# Altium PCB G14_A2_PCB.PcbDoc
Units mm, origin at the board's own origin, x right, y up, seen from the top; angles counter-clockwise.
Board outline 81 x 53 mm, 2 copper layers (Top Layer, Bottom Layer); 24 components, 31 nets, 116 pads, 39 vias.
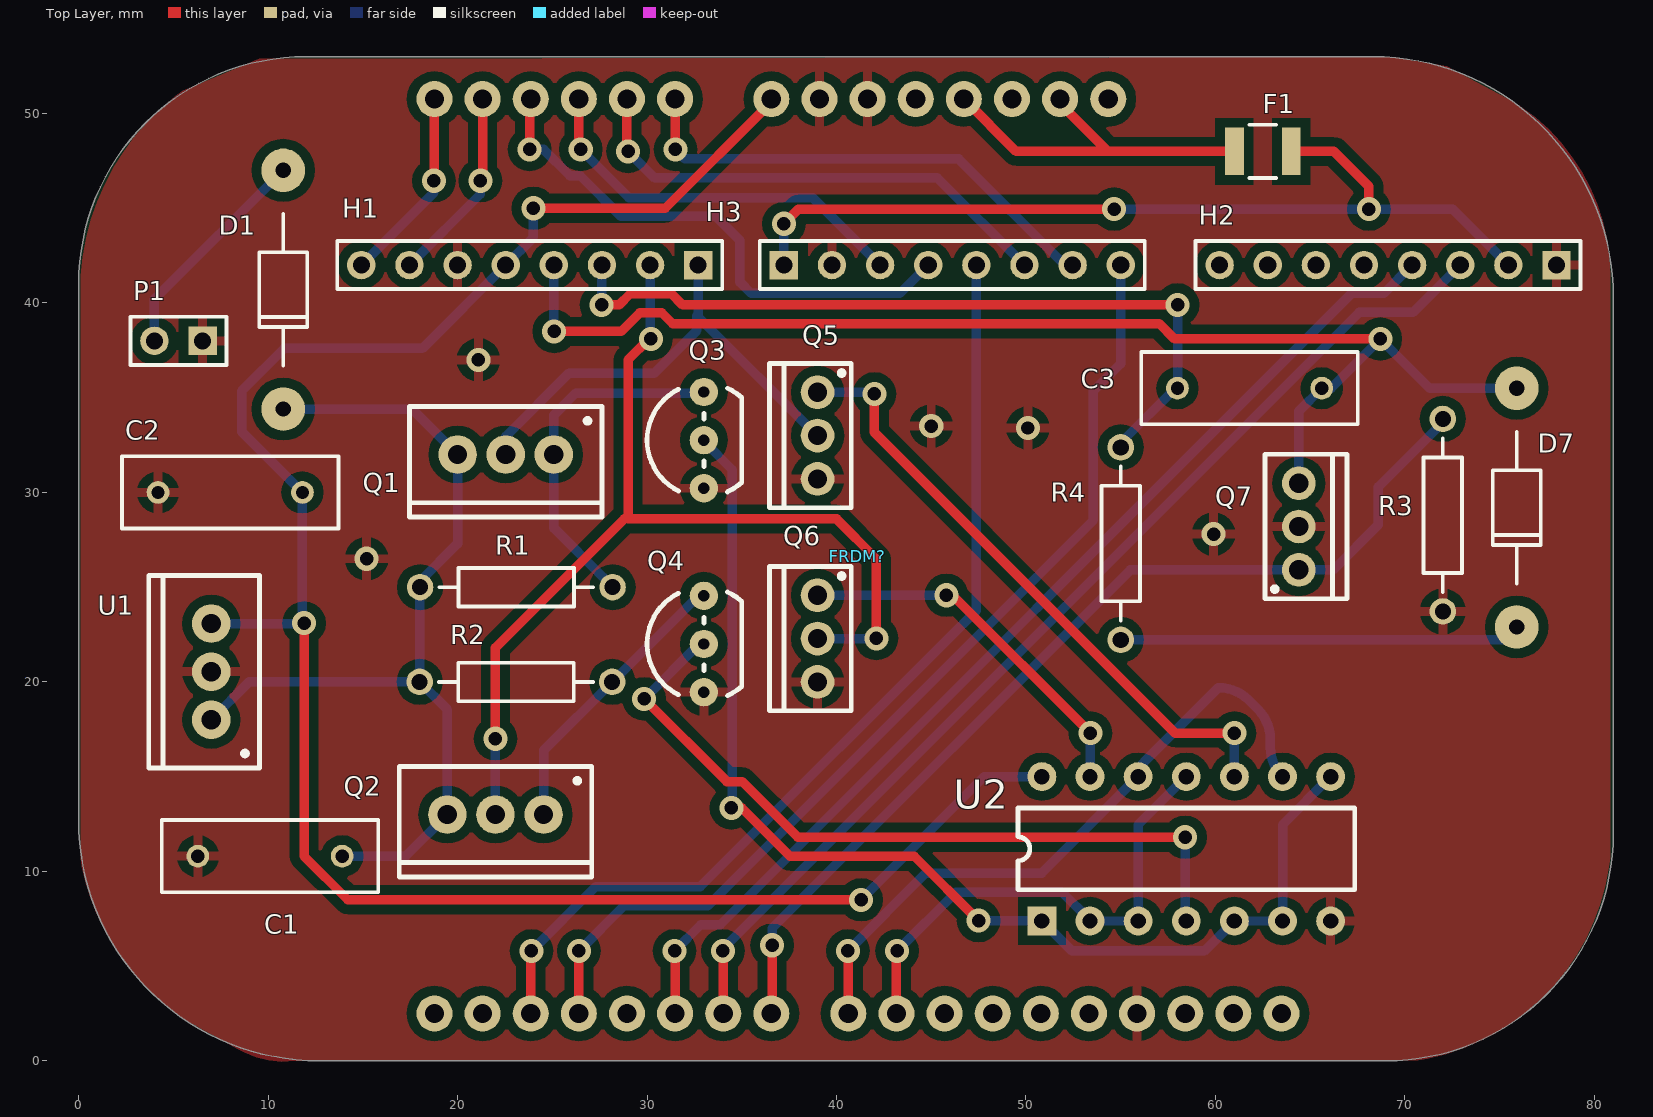
[diagram p0: Top Layer view]
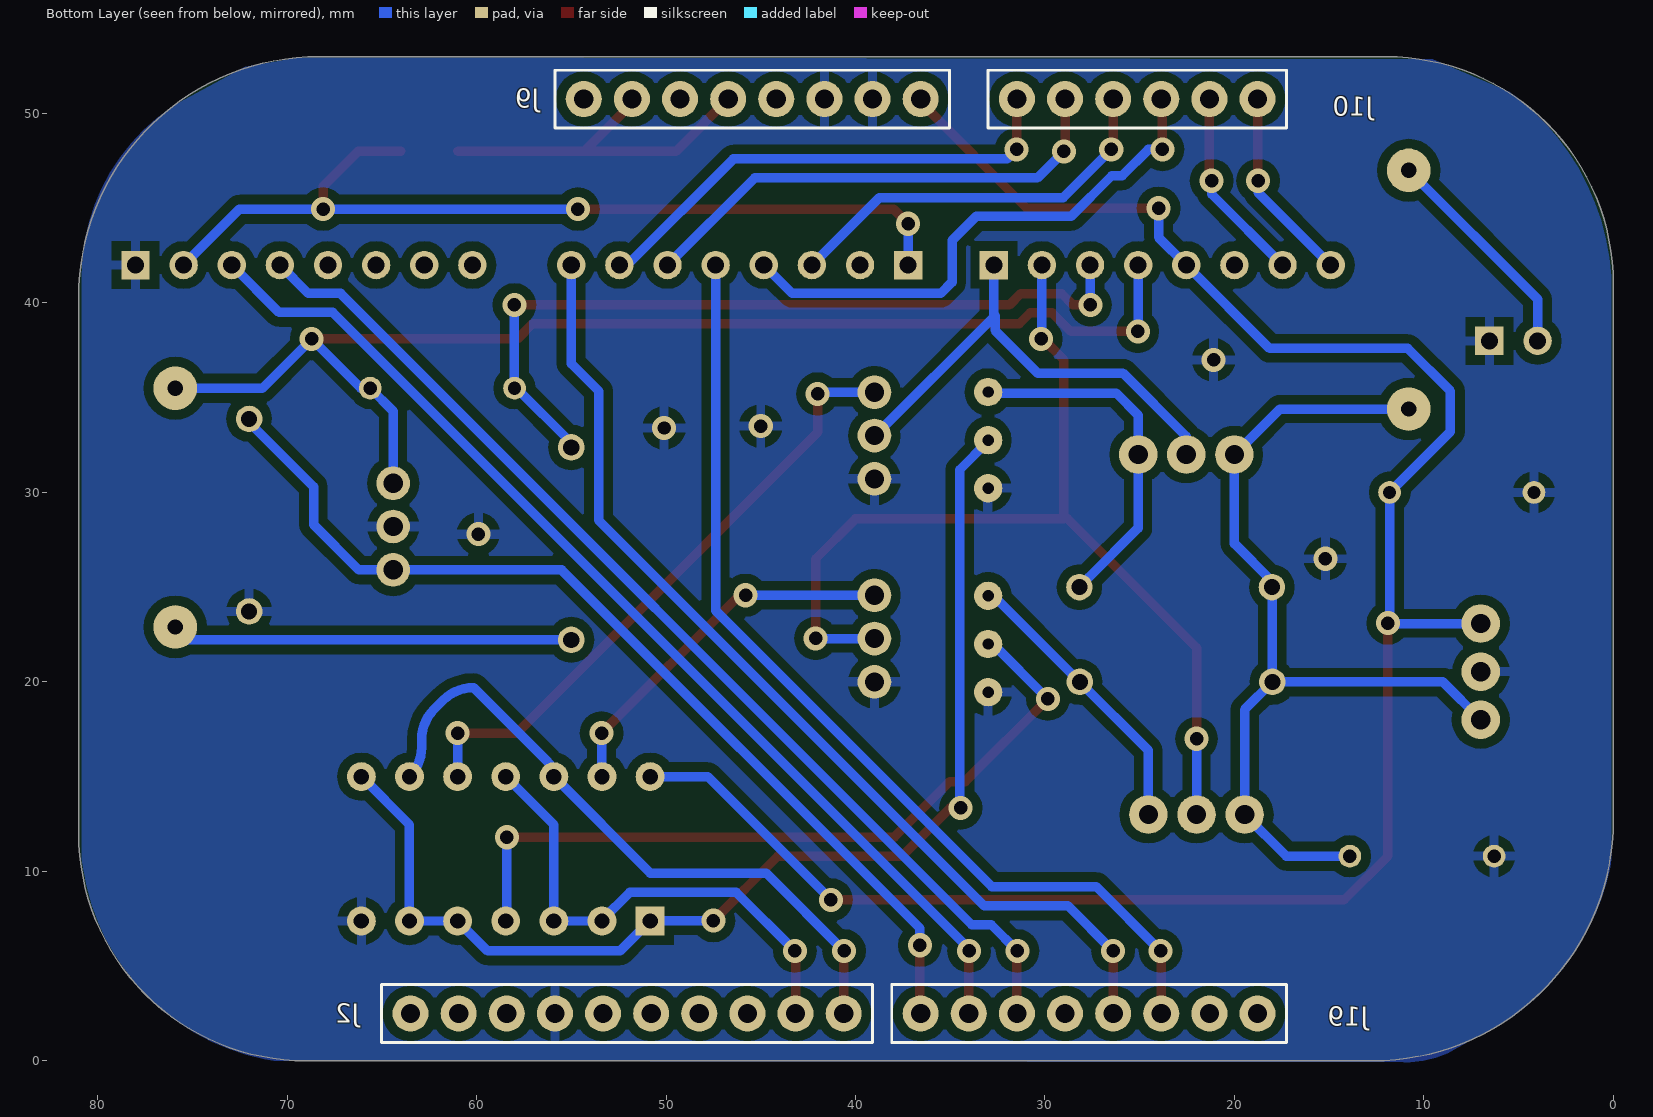
[diagram p1: Bottom Layer view, seen from below]

## Layer stack, top to bottom
Top Solder: solder mask 0.0102, Solder Resist, Dk 3.5
Top Layer: signal copper 0.0356
Dielectric 1: dielectric 0.32, FR-4, Dk 4.8
Bottom Layer: signal copper 0.0356
Bottom Solder: solder mask 0.0102, Solder Resist, Dk 3.5

## Board outline
12.7,0 cw(c12.7,12.7) 0,12.7 0,41 cw(c12,41) 12,53 68.3,53 cw(c68.3,40.3) 81,40.3 81,12 cw(c69,12) 69,0

## Design rules (kind name [scope] priority, off if disabled: settings)
Clearance [All] p1: gap=0.5 ignorepadtopadclearanceinfootprint=FALSE except(0: Arc-Hole Track-Hole SMDPad-Hole THPad-Hole Via-Hole Fill-Hole Poly-Hole Region-Hole Text-Hole)
PolygonConnect [All] p1: connectstyle=Relief reliefconductorwidth=0.5 reliefentries=4 polygonreliefangle="90 Angle" airgapwidth=0.5
RoutingVias [All] p1: holewidth=0.7 width=1.7 viastyle="Through Hole" minholewidth=0.7 minwidth=1.7 maxholewidth=0.7 maxwidth=2.7
SilkToSolderMaskClearance [IsPad] p1: minsilkscreentomaskgap=0.2 clearancetoexposedcopper=TRUE
SolderMaskExpansion [All] p1: expansion=0.102
UnConnectedPin [All] p1:
Width [All] p1: maxlimit=1 minlimit=0.5 preferedwidth=0.5
29 further rules are at their usual default settings.

## Components (designator, comment, footprint, x,y, rotation, side; value= is the part's Value field where it differs from the comment)
C1 "Cap" RAD-0.3 10.1,10.8 r0 top value=0.33u
C2 "Cap" RAD-0.3 8,30 r0 top value=0.1uF
C3 "Cap" RAD-0.3 61.8,35.5 r0 top value=1uF
D1 "1N4001" DO-41 10.8,47 r270 top
D7 "1N4001" DO-41 75.9,35.5 r270 top
F1 "1210L050YR" Fuse-1210 62.5,48 r0 top
FRDM? "FRDM-K20D50M-SINGLE" FRDM-K20D50M-SINGLE 39.1,27.9 r90 top
H1 "Header 8" HDR1X8 32.7,42 r180 top
H2 "Header 8" HDR1X8 78,42 r180 top
H3 "Header 8" HDR1X8 37.22,42 r0 top
P1 "12V Supply" HDR1X2 6.54,38 r180 top
Q1 "FQP17P10" TO-220 22.54,32 r180 top
Q2 "FQP17P10" TO-220 22,13 r180 top
Q3 "2N7000" TO-92 33,32.76 r90 top
Q4 "2N7000" TO-92 33,22 r90 top
Q5 "IRLU2703PBF" TO-251AA 39,33 r90 top
Q6 "IRLU2703PBF" TO-251AA 39,22.286 r90 top
Q7 "IRLU2703PBF" TO-251AA 64.4,28.2 r270 top
R1 "Res2" AXIAL-0.4 23.1,25 r180 top value=4K7
R2 "Res2" AXIAL-0.4 23.08,20 r180 top value=4K7
R3 "Res2" AXIAL-0.4 72,28.8 r90 top value=10k
R4 "100ohm" AXIAL-0.4 55,27.3 r90 top
U1 "" TO-220 7,20.54 r90 top
U2 "SN74HC02N" DIP14 50.84,7.38 r90 top

## Footprints (in the part's own frame and the unit in brackets; to place one, negate y for a bottom-side part, rotate by r counter-clockwise, add the part's x,y. Pads: shape width x height; smd on the part's side, far side on the other; paste and mask are expansions set on the pad)
AXIAL-0.4 [mm] "Axial Device, Thru-Hole; 2 Leads; 0.4 in Pin Spacing"
  round 1.4 hole 0.85: 1(-5.08,0) 2(5.08,0)
  silkscreen extent -4.06,-1.02 4.06,1.02
DIP14 [mil] "14 Pin Dual In-Line Package"
  rect 60x60 hole 32: 1(0,0)
  round 60 hole 32: 2(0,-100) 3(0,-200) 4(0,-300) 5(0,-400) 6(0,-500) 7(0,-600) 8(300,-600) 9(300,-500) 10(300,-400) 11(300,-300) 12(300,-200) 13(300,-100) 14(300,0)
  silkscreen extent 65,-650 235,50
DO-41 [mm] "Diode Outline 41"
  round 2.3 hole 0.8: 1(12.6,0) 2(0,0)
  silkscreen extent 2.3,-1.27 10.3,1.27
FRDM-K20D50M-SINGLE [mil] "FRDM-K20D50M SINGLE"
  round 75 hole 40: J2_2(-1000,-60) J2_4(-1000,-160) J2_6(-1000,-260) J2_8(-1000,-360) J2_10(-1000,-460) J2_12(-1000,-560) J2_14(-1000,-660) J2_16(-1000,-760) J2_18(-1000,-860) J2_20(-1000,-960) J9_2(900,-600) J9_4(900,-500) J9_6(900,-400) J9_8(900,-300) J9_10(900,-200) J9_12(900,-100) J9_14(900,0) J9_16(900,100) J10_2(900,300) J10_4(900,400) J10_6(900,500) J10_8(900,600) J10_10(900,700) J10_12(900,800) J19_2(-1000,800) J19_4(-1000,700) J19_6(-1000,600) J19_8(-1000,500) J19_10(-1000,400) J19_12(-1000,300) J19_14(-1000,200) J19_16(-1000,100)
  body extent -1060,-1020 960,860, height 591
Fuse-1210 [mm] "Polyfuse 1210 SMD"
  rect 1x2.5 smd: 1(-1.5,0) 2(1.5,0)
  silkscreen extent -0.7,-1.4 0.7,1.4
HDR1X2 [mm] "Connector; Header; 2 Position"
  rect 1.5x1.5 hole 0.9: 1(0,0)
  round 1.5 hole 0.9: 2(2.54,0)
  silkscreen extent -1.27,-1.27 3.81,1.27
HDR1X8 [mm] "Connector; Header; 8 Position"
  rect 1.5x1.5 hole 0.9: 1(0,0)
  round 1.5 hole 0.9: 2(2.54,0) 3(5.08,0) 4(7.62,0) 5(10.16,0) 6(12.7,0) 7(15.24,0) 8(17.78,0)
  silkscreen extent -1.27,-1.27 19.05,1.27
RAD-0.3 [mm] "Radial Cap, Thru-Hole; 2 Leads; 0.3 in Pin Spacing"
  round 1.2 hole 0.7: 1(-3.81,0) 2(3.81,0)
  silkscreen extent -5.72,-1.9 5.71,1.91
TO-92 [mm] "Transistor Outline 92"
  round 1.5 hole 0.6: 1(-2.54,0) 2(0,0) 3(2.54,0)
  silkscreen extent -2.73,-2 2.74,3
TO-220 [mil] "Transistor Outline 220"
  round 80 hole 40: 1(-100,0) 2(0,0) 3(100,0)
  silkscreen extent -200,-100 200,130
TO-251AA [mil] "Transistor Outline 251AA"
  round 70 hole 40: 1(90,0) 2(0,0) 3(-90,0)
  silkscreen extent -150,-70 150,100

## Part data
C1 C2 C3: "Capacitor", LatestRevisionDate=17-Jul-2002, LatestRevisionNote="Re-released for DXP Platform.", PackageDescription="Radial Cap, Thru-Hole; 2 Leads; 0.3 in Pin Spacing", PackageReference=RAD-0.3, Published=8-Jun-2000, Publisher="Altium Limited"
D1 D7: "Diode 1A 50V"
F1: "Polyfuse 0.5 A 1210 Package"
FRDM?: "FRDM-K20D50M SINGLE"
H1 H2 H3: "Header, 8-Pin", LatestRevisionDate=17-Jul-2002, LatestRevisionNote="Re-released for DXP Platform.", Publisher="Altium Limited"
P1: library part "Header 2", "Header, 2-Pin", LatestRevisionDate=17-Jul-2002, LatestRevisionNote="Re-released for DXP Platform.", Publisher="Altium Limited"
Q1 Q2: "P-Channel Power MOSFET 100 V 16.5 A"
Q3 Q4: "N-Channel Low Current MOSFET 200mA"
Q5 Q6 Q7: "N-Channel Power MOSFET 30 V 22 A"
R1 R2 R3: "Resistor", LatestRevisionDate=17-Jul-2002, LatestRevisionNote="Re-released for DXP Platform.", PackageDescription="Axial Device, Thru-Hole; 2 Leads; 0.4 in Pin Spacing", PackageReference=AXIAL-0.4, Published=8-Jun-2000, Publisher="Altium Limited"
R4: library part Res2, "Resistor", LatestRevisionDate=17-Jul-2002, LatestRevisionNote="Re-released for DXP Platform.", PackageDescription="Axial Device, Thru-Hole; 2 Leads; 0.4 in Pin Spacing", PackageReference=AXIAL-0.4, Published=8-Jun-2000, Publisher="Altium Limited"
U1: library part L7805ABP, "Precision 5V 1A Regulator"
U2: "Quad 2-Input NOR Gate"

## Via types
v1: diameter 1.27, hole 0.711, Top Layer to Bottom Layer, 39 vias

## Nets (pads, with @x,y where several pads share a name; then routed paths per layer and width w, separated by ;. In a path a pad name is that pad's centre, name@x,y a point inside that pad or via, vN(x,y) a via of type N, cw(c..) or ccw(c..) an arc to the next point about the centre after c; other vN are vias at no path point)
3V3: F1.2 H2.2 H3.1 | length 48
  Top Layer w0.5: v1(37.22,44.18) 37.99,44.95 v1(54.65,44.95) ; F1.2 66.25,48 68.1,46.15 v1(68.1,44.95)
  Bottom Layer w0.5: H3.1 v1(37.22,44.18) ; v1(54.65,44.95) v1(68.1,44.95) 72.51,44.95 H2.2
5V_VCC: C2.2 FRDM?.J9_16 H1.5 U1.3 U2.14 | length 108.8
  Top Layer w0.5: v1(11.9,23.1) 11.9,10.8 14.2,8.5 v1(41.3,8.5) ; v1(24,45) 30.959,45 FRDM?.J9_16@36.519,50.561
  Bottom Layer w0.5: U1.3 11.88,23.08 v1(11.9,23.1) ; v1@11.81,23.1 C2.2 8.6,33.21 8.6,35.35 10.85,37.6 18.14,37.6 H1.5 24,43.46 v1(24,45) ; v1(41.3,8.5) 47.8,15 U2.14 U2.14@50.6,15.24
12V_VCC: C1.2 D1.1 Q1.3 Q2.3 R1.2 R2.2 U1.1 | length 48.9
  Bottom Layer w0.5: U1.1 9,20 R2.2 ; D1.1 17.6,34.4 Q1.3 20,27.3 18,25.3 R2.2 ; C1.2 17.26,10.8 Q2.3 19.46,18.54 R2.2
DIR: FRDM?.J2_4 U2.2 U2.3 U2.11 | length 26.7
  Top Layer w0.5: FRDM?.J2_4 43.164,5.764 v1(43.2,5.8) ; U2.2@53.38,7.335 U2.2
  Bottom Layer w0.5: v1(43.2,5.8) 46.292,8.892 51.913,8.892 53.38,7.425 U2.2 U2.3 55.92,12.46 U2.11
EM: FRDM?.J19_16 Q7.1 R3.2 | length 51.7
  Top Layer w0.5: FRDM?.J19_16 36.6,2.54 v1(36.6,6.1)
  Bottom Layer w0.5: v1(36.6,6.1) 36.6,7 55.514,25.914 Q7.1 66.214,25.914 68.6,28.3 68.6,30.3 R3.2@71.68,33.38
EM+: C3.1 H1.3 R4.2 | length 41.8
  Top Layer w0.5: v1(27.6,39.9) 28.527,39.9 29.112,40.485 31.288,40.485 31.873,39.9 v1(58,39.9)
  Bottom Layer w0.5: v1(27.6,39.9) 27.6,41.952 cw(c27.668,41.952) H1.3 ; R4.2 55,32.62 C3.1@57.935,35.555 ; C3.1 58,35.51 v1(58,39.9)
EM-: C3.2 D7.2 H1.4 Q7.3 | length 66.1
  Top Layer w0.5: v1(25.1,38.5) 28.641,38.5 29.626,39.485 30.774,39.485 31.359,38.9 57.041,38.9 57.841,38.1 v1(68.7,38.1)
  Bottom Layer w0.5: v1(25.1,38.5) cw(c25.148,38.548) 25.08,38.548 H1.4 cw(c25.032,41.952) H1.4@25.1,41.952 ; Q7.3 64.4,34.29 C3.2 66.1,35.5 v1(68.7,38.1) 71.3,35.5 D7.2
GND: C1.1 C2.1 FRDM?.J2_14 FRDM?.J9_12 FRDM?.J9_14 H1.6 H2.1 H3.2 P1.1 Q3.1 Q4.1 Q5.3 Q6.3 Q7.2 R3.1 U1.2 U2.7
  other v1: 15.2,26.5 59.9,27.8 50.1,33.4 45,33.5 21.1,37
H1: Q3.2 U2.1 U2.5 U2.6 U2.8 | length 61.6
  Top Layer w0.5: v1(34.45,13.35) 34.994,13.35 37.544,10.8 44.1,10.8 v1(47.5,7.4)
  Bottom Layer w0.5: Q3.2@33,32.7 34.5,31.2 34.5,13.4 v1(34.45,13.35) v1@34.5,13.3 ; v1(47.5,7.4) 50.82,7.4 U2.1 52.42,5.8 59.42,5.8 U2.5 U2.6 63.54,12.46 U2.8
H2: Q4.2 U2.4 | length 40.8
  Top Layer w0.5: v1(29.85,19.1) 34.215,14.735 35.024,14.735 37.959,11.8 v1(58.4,11.8)
  Bottom Layer w0.5: v1(29.85,19.1) 32.75,22 Q4.2 ; v1(58.4,11.8) 58.4,7.44 U2.4 U2.4@58.46,6.96
Hall_OutA: FRDM?.J19_14 H2.3 | length 57.3
  Top Layer w0.5: v1(34,5.8) 34.02,5.78 FRDM?.J19_14
  Bottom Layer w0.5: v1@33.945,5.855 67.591,39.5 70.42,39.5 H2.3
Hall_OutB: FRDM?.J19_12 H2.4 | length 57.2
  Top Layer w0.5: v1(31.45,5.8) 31.48,5.77 FRDM?.J19_12
  Bottom Layer w0.5: v1(31.45,5.8) 32.835,7.185 33.862,7.185 67.177,40.5 68.88,40.5 H2.4
L1: Q5.1 U2.10 | length 33
  Top Layer w0.5: v1(42,35.2) 42,33.169 57.869,17.3 v1(61,17.3)
  Bottom Layer w0.5: Q5.1 41.992,35.286 42,35.278 v1(42,35.2) ; U2.10 v1(61,17.3)
L2: Q6.1 U2.13 | length 19.4
  Top Layer w0.5: v1@46.128,24.572 v1(53.4,17.3)
  Bottom Layer w0.5: Q6.1 v1(45.8,24.572) ; U2.13 53.4,15.02 v1(53.4,17.3)
LHoriz: FRDM?.J10_2 H3.7 | length 26.2
  Top Layer w0.5: FRDM?.J10_2 31.48,48.12 v1(31.5,48.1)
  Bottom Layer w0.5: v1(31.5,48.1) 32,47.6 46.441,47.6 52.041,42 H3.7
LSwitch: FRDM?.J19_8 H3.8 | length 53.9
  Top Layer w0.5: FRDM?.J19_8 v1(26.4,5.8)
  Bottom Layer w0.5: v1(26.4,5.8) 28.785,8.185 33.215,8.185 53.55,28.52 53.55,35.35 55,36.8 H3.8
LVert: FRDM?.J10_4 H3.6 | length 26.2
  Top Layer w0.5: FRDM?.J10_4 28.94,48.06 v1(29,48)
  Bottom Layer w0.5: v1(29,48) 30.4,46.6 45.32,46.6 H3.6
MOTOR+: H1.1 Q1.2 Q5.2 | length 25.9
  Bottom Layer w0.5: Q1.2 22.54,32.954 25.886,36.3 30.385,36.3 32.634,38.549 32.634,39.334 32.668,39.3 ; H1.1 32.7,39.332 32.668,39.3 ; Q5.2 38.968,33 32.668,39.3
MOTOR-: H1.2 Q2.2 Q6.2 | length 53.7
  Top Layer w0.5: v1(22,17) 22,21.8 28.8,28.6 ; v1(30.2,38.1) 30.1,38.1 29,37 29,28.6 40,28.6 42.1,26.5 v1(42.1,22.3)
  Bottom Layer w0.5: Q2.2 v1(22,17) ; H1.2 30.16,38.14 v1(30.2,38.1) ; Q6.2 42.086,22.286 v1(42.1,22.3)
NetC3_2: 
NetD1_2: D1.2 P1.2 | length 11.8
  Bottom Layer w0.5: P1.2 4,40.2 D1.2
NetD7_1: D7.1 R4.1 | length 21.2
  Bottom Layer w0.5: R4.1 75.22,22.22 D7.1
NetF1_1: F1.1 FRDM?.J9_4 FRDM?.J9_8 | length 19.7
  Top Layer w0.5: FRDM?.J9_8 49.48,48 54.32,48 ; FRDM?.J9_4@51.32,51 54.32,48 ; F1.1 54.32,48
NetQ1_1: Q1.1 Q3.3 R1.1 | length 18
  Bottom Layer w0.5: 27.68,25.52 25.08,28.12 Q1.1 25.08,34.08 26.24,35.24 Q3.3@33,35.24
NetQ2_1: Q2.1 Q4.3 R2.1 | length 15.2
  Bottom Layer w0.5: Q2.1 24.54,16.38 R2.1 32.7,24.54 Q4.3
PWM: FRDM?.J2_2 U2.9 U2.12 | length 35.2
  Top Layer w0.5: v1(40.6,5.8) 40.624,5.776 FRDM?.J2_2
  Bottom Layer w0.5: v1(40.6,5.8) 44.7,9.9 50.82,9.9 U2.12 cw(c57.047,15) 56.25,15.797 60.153,19.7 cw(c60.153,17.414) 61.77,19.03 62.23,18.57 cw(c60.614,16.953) 62.9,16.953 62.9,16.545 ccw(c65.085,16.545) U2.9
RHoriz: FRDM?.J10_8 H3.4 | length 29.2
  Top Layer w0.5: FRDM?.J10_8@23.38,51 23.8,50.58 v1(23.8,48.1)
  Bottom Layer w0.5: v1(23.8,48.1) 24.541,48.1 25.926,46.715 26.471,46.715 28.621,44.565 33.635,44.565 34.9,43.3 34.9,41.1 35.5,40.5 43.34,40.5 H3.4
RSwitch: FRDM?.J19_6 H3.5 | length 52.5
  Top Layer w0.5: FRDM?.J19_6 23.86,5.76 v1(23.9,5.8)
  Bottom Layer w0.5: v1(23.9,5.8) 27.285,9.185 32.801,9.185 47.38,23.764 H3.5
RVert: FRDM?.J10_6 H3.3 | length 21.5
  Top Layer w0.5: FRDM?.J10_6@25.92,51 26.4,50.52 26.4,48.2 v1(26.5,48.1)
  Bottom Layer w0.5: v1(26.5,48.1) 29.035,45.565 38.735,45.565 H3.3
Servo1: FRDM?.J10_10 H1.7 | length 10.4
  Top Layer w0.5: v1(21.2,46.45) 21.32,46.57 FRDM?.J10_10
  Bottom Layer w0.5: H1.7 21.2,45.74 v1(21.2,46.45)
Servo2: FRDM?.J10_12 H1.8 | length 10.4
  Top Layer w0.5: v1(18.75,46.45) 18.78,46.48 FRDM?.J10_12
  Bottom Layer w0.5: H1.8 18.75,45.83 v1(18.75,46.45)
pads on no net: FRDM?.J2_6 FRDM?.J2_8 FRDM?.J2_10 FRDM?.J2_12 FRDM?.J2_16 FRDM?.J2_18 FRDM?.J2_20 FRDM?.J9_2 FRDM?.J9_6 FRDM?.J9_10 FRDM?.J19_2 FRDM?.J19_4 FRDM?.J19_10 H2.5 H2.6 H2.7 H2.8

## Polygon pours and split planes (outlines as drawn)
GND on Top Layer "Top GND Plane" (solid, remove dead copper, pour order 6): 9.528,52.898 5.494,51.196 ccw(c13.218,40.587) 0.1,40.937 0.1,10.689 ccw(c12.95,12.95) 5.642,2.141 8.431,0.611 ccw(c10.949,5.2) 11.061,-0.033 70.695,0.032 ccw(c68.752,12.019) 80.824,10.702 80.824,41.027 ccw(c70.014,41.419) 75.71,50.614 72.214,52.498 69.3,53
GND on Bottom Layer "Bottom GND Plane" (solid, remove dead copper, pour order 14): 9.528,52.86 5.494,51.158 ccw(c13.218,40.55) 0.1,40.9 0.1,10.651 ccw(c12.95,12.912) 5.642,2.103 8.431,0.573 ccw(c10.949,5.163) 11.061,-0.071 70.695,-0.005 ccw(c68.752,11.982) 80.824,10.665 80.824,40.989 ccw(c70.014,41.381) 75.71,50.577 72.214,52.46 69.3,52.963

## Silkscreen, mask and mechanical layers (free items; w line width, h text height)
Drill Drawing:
  lines w0.254: 0,12.1 ccw(c12.3,12.3) 12.5,0 69.5,0 ccw(c69.5,11.5) 81,11.5 81,40.9 ccw(c68.7,40.7) 68.5,53 11.5,53 ccw(c11.5,41.5) 0,41.5 0,12.1

## Text inside footprints (layer, text, board x,y; h text height)
FRDM?: Bottom Overlay "J10" at 12.684,49.871 h1; Bottom Overlay "J9" at 56.7,50.3 h1; Bottom Overlay "J2" at 66.2,2 h1; Bottom Overlay "J19" at 12.938,1.865 h1